# Altium PCB PCB1.PcbDoc
Units mil, origin at the board's own origin, x right, y up, seen from the top; angles counter-clockwise.
Board outline 1811.02 x 1259.84 mil, 2 copper layers (Top Layer, Bottom Layer); 8 components, 8 nets, 38 pads, 2 vias.
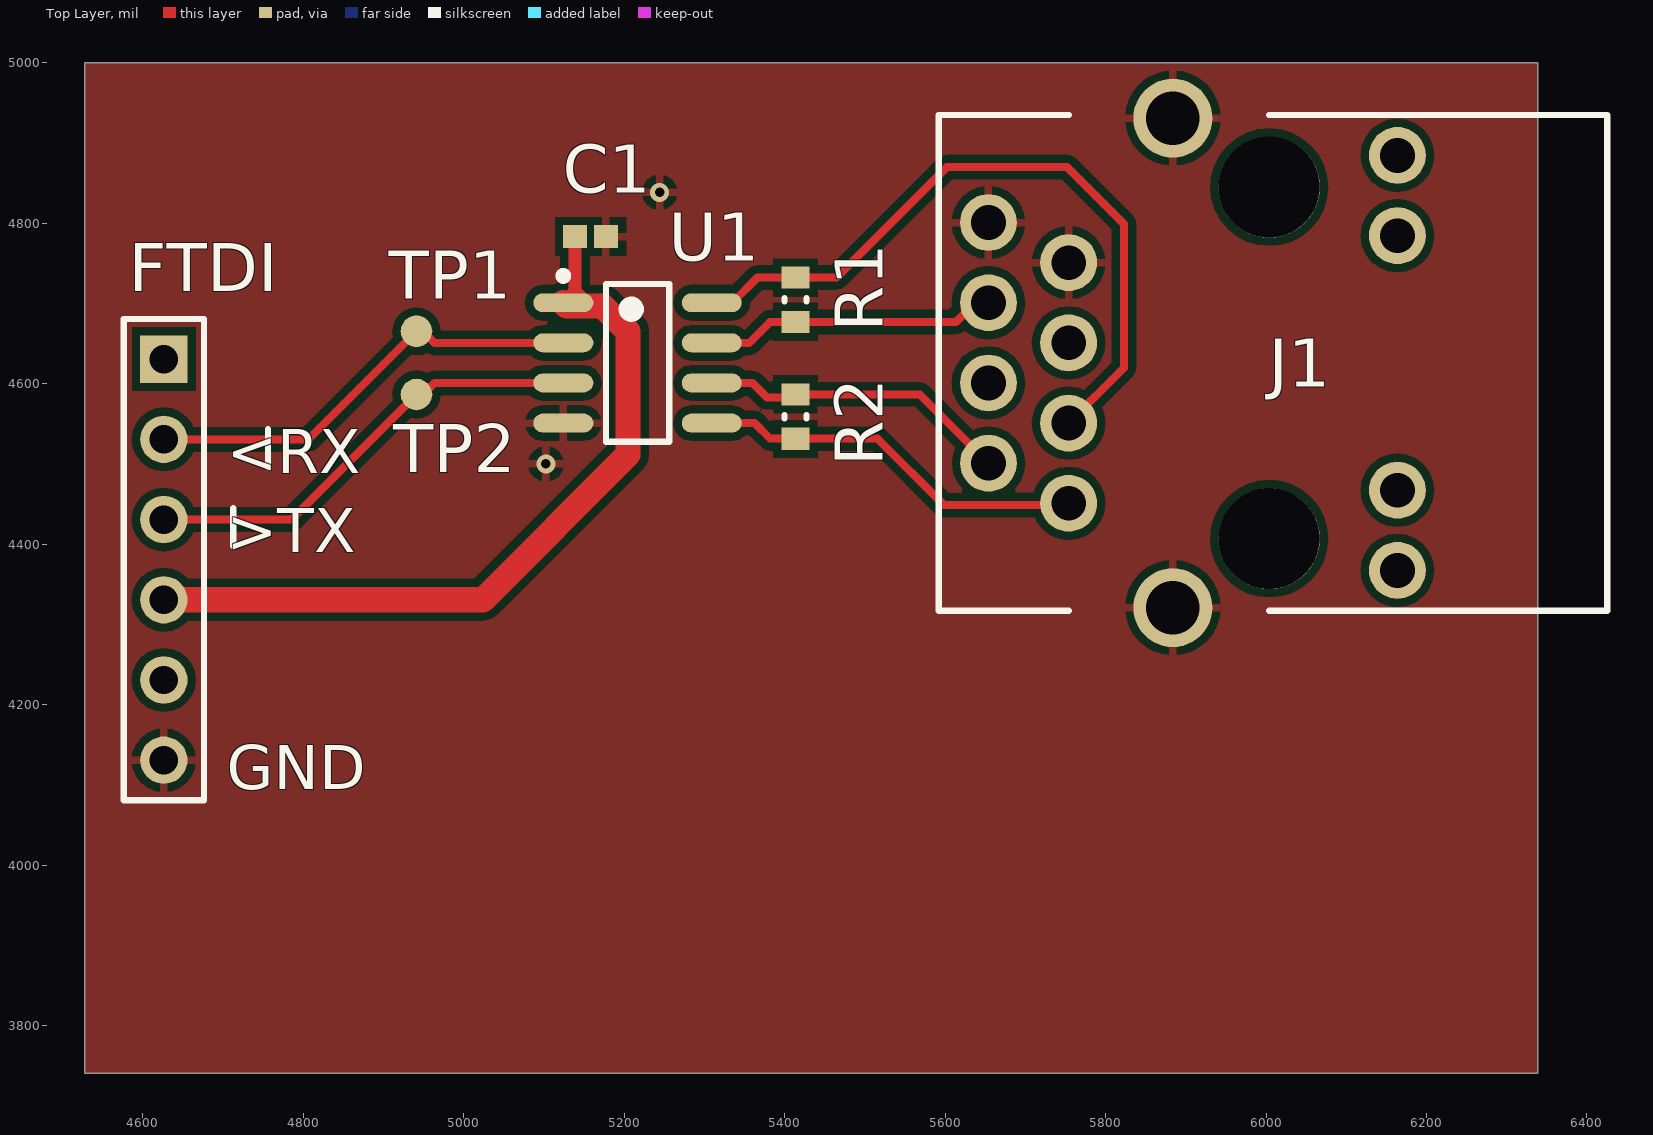
[diagram p0: Top Layer view]
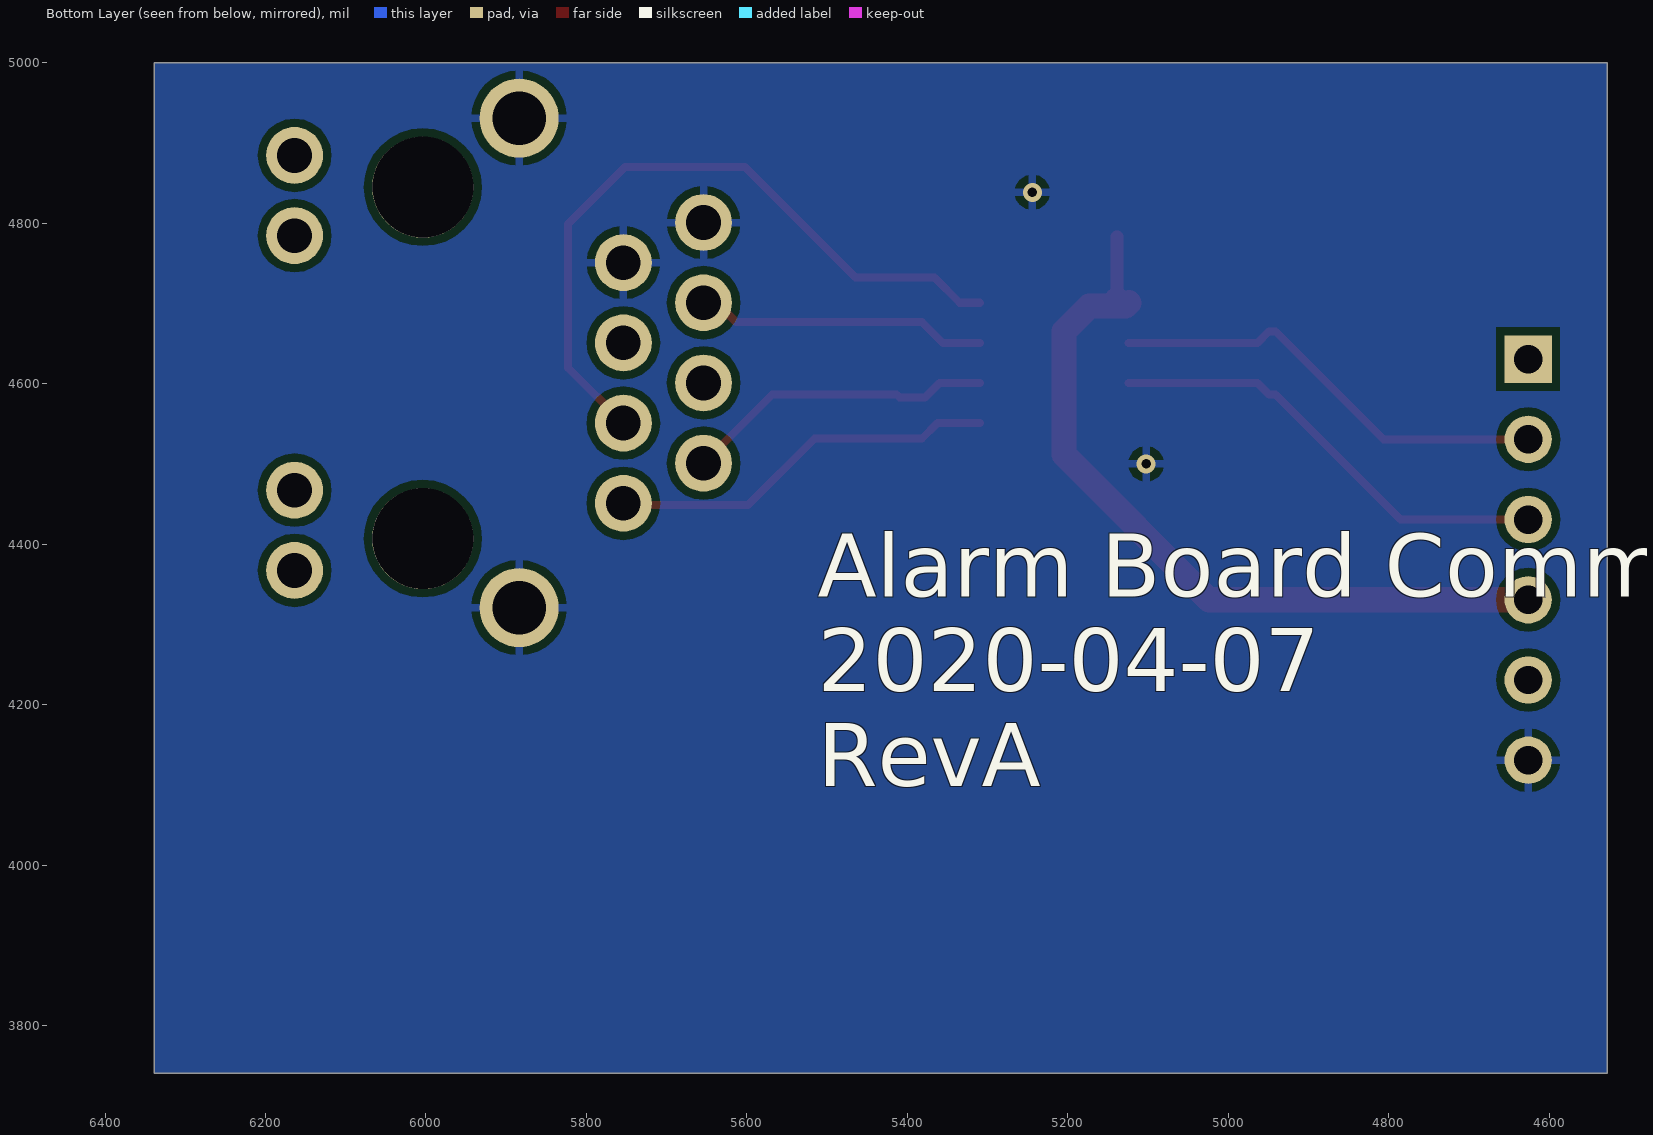
[diagram p1: Bottom Layer view, seen from below]

## Layer stack, top to bottom
Top Solder: solder mask 0.4, Solder Resist, Dk 3.5
Top Layer: signal copper 1.4
Dielectric 1: dielectric 12.6, FR-4, Dk 4.8
Bottom Layer: signal copper 1.4
Bottom Solder: solder mask 0.4, Solder Resist, Dk 3.5

## Board outline
4527.56,3740.16 6338.58,3740.16 6338.58,5000 4527.56,5000

## Design rules (kind name [scope] priority, off if disabled: settings)
Clearance [All] p1: gap=10 ignorepadtopadclearanceinfootprint=FALSE except(0: Arc-Hole Track-Hole SMDPad-Hole THPad-Hole Via-Hole Fill-Hole Poly-Hole Region-Hole Text-Hole)
PolygonConnect [All] p1: connectstyle=Relief reliefconductorwidth=10 reliefentries=4 polygonreliefangle="90 Angle" airgapwidth=10
RoomDefinition Sheet4 [InComponentClass('Sheet4')] p1: confinementstyle=ConfineIn formatcopy=TRUE lockcomponents=FALSE outline 4133.86,3267.72 6732.28,3267.72 6732.28,5314.96 4133.86,5314.96
RoutingVias [All] p1: holewidth=28 width=50 viastyle="Through Hole" minholewidth=28 minwidth=50 maxholewidth=28 maxwidth=50
SolderMaskExpansion [All] p1: expansion=4 istentingtop=FALSE
Width [All] p1: maxlimit=314.96 minlimit=10 preferedwidth=10
30 further rules are at their usual default settings.

## Components (designator, comment, footprint, x,y, rotation, side; value= is the part's Value field where it differs from the comment)
C1 "GRM155R71C104KA88D" CAPC1005X55X25ML05T10 5157.87,4783.46 r180 top
FTDI "Header 6" HDR1X6 4625.98,4630.71 r270 top
J1 "RJ45_59_8P8C_LED" RJ45_59_8P8C_LED 6003.94,4625.98 r90 top
R1 "120R 5% 0603(1608)" RESC0603(1608)_L 5413.39,4704.72 r90 top value="120.00 Ohm"
R2 "120R 5% 0603(1608)" RESC0603(1608)_L 5413.39,4559.06 r270 top value="120.00 Ohm"
TP1 "TEST_POINT" TP-SMD-1mm 4940.94,4665.35 r270 top
TP2 "TEST_POINT" TP-SMD-1mm 4940.94,4586.61 r270 top
U1 "ADM3488ARZ" ADI-R-8_L 5216.54,4625.98 r0 top

## Footprints (in the part's own frame and the unit in brackets; to place one, negate y for a bottom-side part, rotate by r counter-clockwise, add the part's x,y. Pads: shape width x height; smd on the part's side, far side on the other; paste and mask are expansions set on the pad)
ADI-R-8_L [mm] "SOIC, 8-Leads, Body 5x4mm, Pitch 1.27mm, IPC High Density"
  oval 1.9x0.6 smd: 1(-2.35,1.905) 2(-2.35,0.635) 3(-2.35,-0.635) 4(-2.35,-1.905) 5(2.35,-1.905) 6(2.35,-0.635) 7(2.35,0.635) 8(2.35,1.905)
  silkscreen extent -2.47,-2.5 1,2.88, body extent -2,-2.5 2,2.5, height 1.75
CAPC1005X55X25ML05T10 [mm] "Chip Capacitor, 2-Leads, Body 1.00x0.50mm, IPC Low Density"
  rect 0.76x0.72 smd: 1(-0.49,0) 2(0.49,0)
  body extent -0.53,-0.28 0.53,0.27, height 0.55
HDR1X6 [mm] "Connector; Header; 6 Position"
  rect 1.5x1.5 hole 0.9: 1(0,0)
  round 1.5 hole 0.9: 2(2.54,0) 3(5.08,0) 4(7.62,0) 5(10.16,0) 6(12.7,0)
  silkscreen extent -1.27,-1.27 13.97,1.27
RESC0603(1608)_L [mm] "Chip Resistor, Body 1.6x0.8mm, IPC High Density"
  rect 0.7x0.9 smd: 1(-0.7,0) 2(0.7,0)
  silkscreen extent -0.05,-0.35 0.05,0.35, body extent -0.85,-0.47 0.85,0.47, height 0.6
RJ45_59_8P8C_LED [mm] "Generic RJ49 jack with LED and without magnetics"
  round 1.8 hole 1.1: 1(-4.445,6.35) 2(-3.175,8.89) 3(-1.905,6.35) 4(-0.635,8.89) 5(0.635,6.35) 6(1.905,8.89) 7(3.175,6.35) 8(4.445,8.89) 9(-6.57,-4.06) 10(-4.03,-4.06) 11(4.03,-4.06) 12(6.57,-4.06)
  round 3.2 hole 3.2 unplated: POS1(-5.565,0) POS2(5.565,0)
  round 2.5 hole 1.7: S1(-7.75,3.05) S2(7.75,3.05)
  silkscreen extent -7.85,-10.7 7.85,10.46, body extent -7.85,-10.58 7.85,10.58, height 13.45
TP-SMD-1mm [mm] "Test point, round, 1mm, SMD"
  round 1 smd paste-999: 1(0,0)

## Part data
C1: library part CMP-2100-03641-1, "Chip Capacitor, 0.1 uF, +/- 10%, 16 V, -55 to 125 degC, 0402 (1005 Metric), RoHS, Tape and Reel", Capacitance=100nF, Case Code (Imperial)=0402, Case Code (Metric)=1005, Dielectric=X7R, Dielectric Material=Ceramic, Insulation Resistance=10GR, Manufacturer=Murata, Max Operating Temperature=125degC, Min Operating Temperature=-55degC, Package Description="2-Pin Surface Mount Device, Body 1 x 0.5 mm", Package Quantity=1, Tolerance=10%, Voltage=16V, Case/Package=0402, Datasheet URL=http://psearch.en.murata.com/capacitor/product/GRM155R71C104KA88%23.pdf, Datasheet Version=42675.0, Depth=0.5mm, Height=0.5mm, Lead Free=LeadFree, Length=1mm, Manufacturer URL=http://www.murata.com/, Material=Ceramic, Mount=SurfaceMount, Number of Pins=2, Package Reference=0402, Packaging=TapeandReel, Radiation Hardening=No, REACH SVHC=NoSVHC, RoHSCompliant=true, Termination=SMD/SMT, Thickness=0.022inch, Voltage Rating=16V, Voltage Rating (DC)=16V, Width=0.5mm
FTDI: "Header, 6-Pin", LatestRevisionDate=17-Jul-2002, LatestRevisionNote="Re-released for DXP Platform.", Publisher="Altium Limited"
J1: "Generic RJ49 jack with LED and without magnetics", Manufacturer=Unknown/Generic, PartNumber=RJ45_59_8P8C_LED
R1 R2: library part CMP-1012-00052-1, "120R 0.1W 5% 0603 (1608 Metric)  SMD", Case-EIA=0603, Case-Metric=1608, Power="0.1 W", Tolerance="5 %", Technology=SMT
TP1 TP2: "Test point"
U1: library part CMP-0535-00058-1, "3.3 V Slew Rate Limited, Full-Duplex, RS-485/RS-422 Transceivers, 3 to 3.6 V, -40 to 85 degC, 8-Pin SOIC (R-8), RoHS, Tube", Manufacturer="Analog Devices", Supply Voltage="3 to 3.6 V", Temperature Range="-40 to 85 degC", ComponentLink1Description="Manufacturer URL", ComponentLink1URL=http://www.analog.com/en/index.html, ComponentLink2Description=Datasheet, ComponentLink2URL=http://www.analog.com/static/imported-files/data_sheets/ADM3483_3485_3488_3490_3491.pdf, ComponentLink3Description="Package Specification", ComponentLink3URL=http://www.analog.com/media/en/package-pcb-resources/package/pkg_pdf/soic_narrow-r/r_8.pdf, DatasheetVersion="Rev. E", Duplex=Full, Guaranteed Data Rate="0.25 Mbps", Mounting Technology="Surface Mount", Number of Drivers=1, PackageDescription="8-Pin Standard Small Outline Package, Body 4.9 x 3.9 mm, Pitch 1.27 mm", PackageVersion=06/2006, Packing=Tube, PartNumber=ADM3488ARZ, Receiver Hysteresis="50 mV", RoHS=TRUE

## Via types
v1: diameter 23.62, hole 11.81, Top Layer to Bottom Layer, 2 vias

## Nets (pads, with @x,y where several pads share a name; then routed paths per layer and width w, separated by ;. In a path a pad name is that pad's centre, name@x,y a point inside that pad or via, vN(x,y) a via of type N, cw(c..) or ccw(c..) an arc to the next point about the centre after c; other vN are vias at no path point)
+3.3V: C1.2 FTDI.4 U1.1 | length 986.9
  Top Layer w15.75: U1.1@5138.58,4704.92 C1.2
  Top Layer w31.5: FTDI.4 5023.62,4330.71 5204.72,4511.81 5204.72,4665.35 5173.03,4697.05 5127.95,4697.05 U1.1 ; U1.1@5134.65,4700.98 U1.1@5138.58,4704.92
GND: C1.1 FTDI.6 J1.7 J1.8 J1.S1 J1.S2 U1.4
  other v1: 5102.36,4500 5244.09,4838.58
SENSOR_RX+: J1.3 R1.2 U1.8 | length 889.9
  Top Layer w10: U1.8 5334.65,4700.98 5365.94,4732.28 R1.2 5464.57,4732.28 5602.36,4870.08 5751.97,4870.08 5822.83,4799.21 5822.83,4619.88 J1.3
SENSOR_RX-: J1.6 R1.1 U1.7 | length 365.6
  Top Layer w10: U1.7 5355.71,4650.98 5381.89,4677.17 R1.1 5613.65,4677.17 5637.47,4700.98 J1.6
SENSOR_TX+: J1.1 R2.2 U1.5 | length 488.1
  Top Layer w10: U1.5 5362.4,4550.98 5381.89,4531.5 R2.2 5515.75,4531.5 5598.43,4448.82 5751.77,4448.82 J1.1
SENSOR_TX-: J1.2 R2.1 U1.6 | length 389.6
  Top Layer w10: U1.6 5359.65,4600.98 5377.95,4582.68 5409.45,4582.68 R2.1 5568.31,4586.61 J1.2
USART1_RX: FTDI.2 TP1.1 U1.2 | length 559.8
  Top Layer w10: FTDI.2 4806.3,4530.71 TP1.1 4948.89,4665.35 4963.26,4650.98 U1.2
USART1_TX: FTDI.3 TP2.1 U1.3 | length 568.6
  Top Layer w10: FTDI.3 4785.04,4430.71 TP2.1 4948.89,4586.61 4963.26,4600.98 U1.3
pads on no net: FTDI.1 FTDI.5 J1.4 J1.5 J1.9 J1.10 J1.11 J1.12 J1.POS1 J1.POS2

## Polygon pours and split planes (outlines as drawn)
GND on Bottom Layer "GND_L02_P000" (solid, pour order 0): 4527.56,3740.16 6338.58,3740.16 6338.58,5000 4527.56,5000
GND on Top Layer "GND_L01_P001" (solid, pour order 1): 4527.56,3740.16 6338.58,3740.16 6338.58,5000 4527.56,5000

## Silkscreen, mask and mechanical layers (free items; w line width, h text height)
Top Overlay:
  lines w7.87: 4712.6,4397.64 4712.6,4444.88 ; 4755.91,4496.06 4755.91,4543.31
  text "<RX" at 4704.72,4488.19 h55.12
  text ">TX" at 4704.72,4389.76 h55.12
  text "GND" at 4704.72,4094.49 h55.12
Bottom Overlay:
  text "Alarm Board Comms / 2020-04-07 / RevA" at 5511.81,4098.43 h78.74
Mechanical 1:
  the board outline again, w3.94

## Dimensions
4527.56,3740.16 to 6338.58,3740.16 on Dimensions
4527.56,3740.16 to 4527.56,5000 on Dimensions